# Altium PCB PCB Module Measurment.PcbDoc
Units mil, origin at the board's own origin, x right, y up, seen from the top; angles counter-clockwise.
Board outline 6000 x 4000 mil, 2 copper layers (Top Layer, Bottom Layer); 1 components, 0 nets, 40 pads, 0 vias.
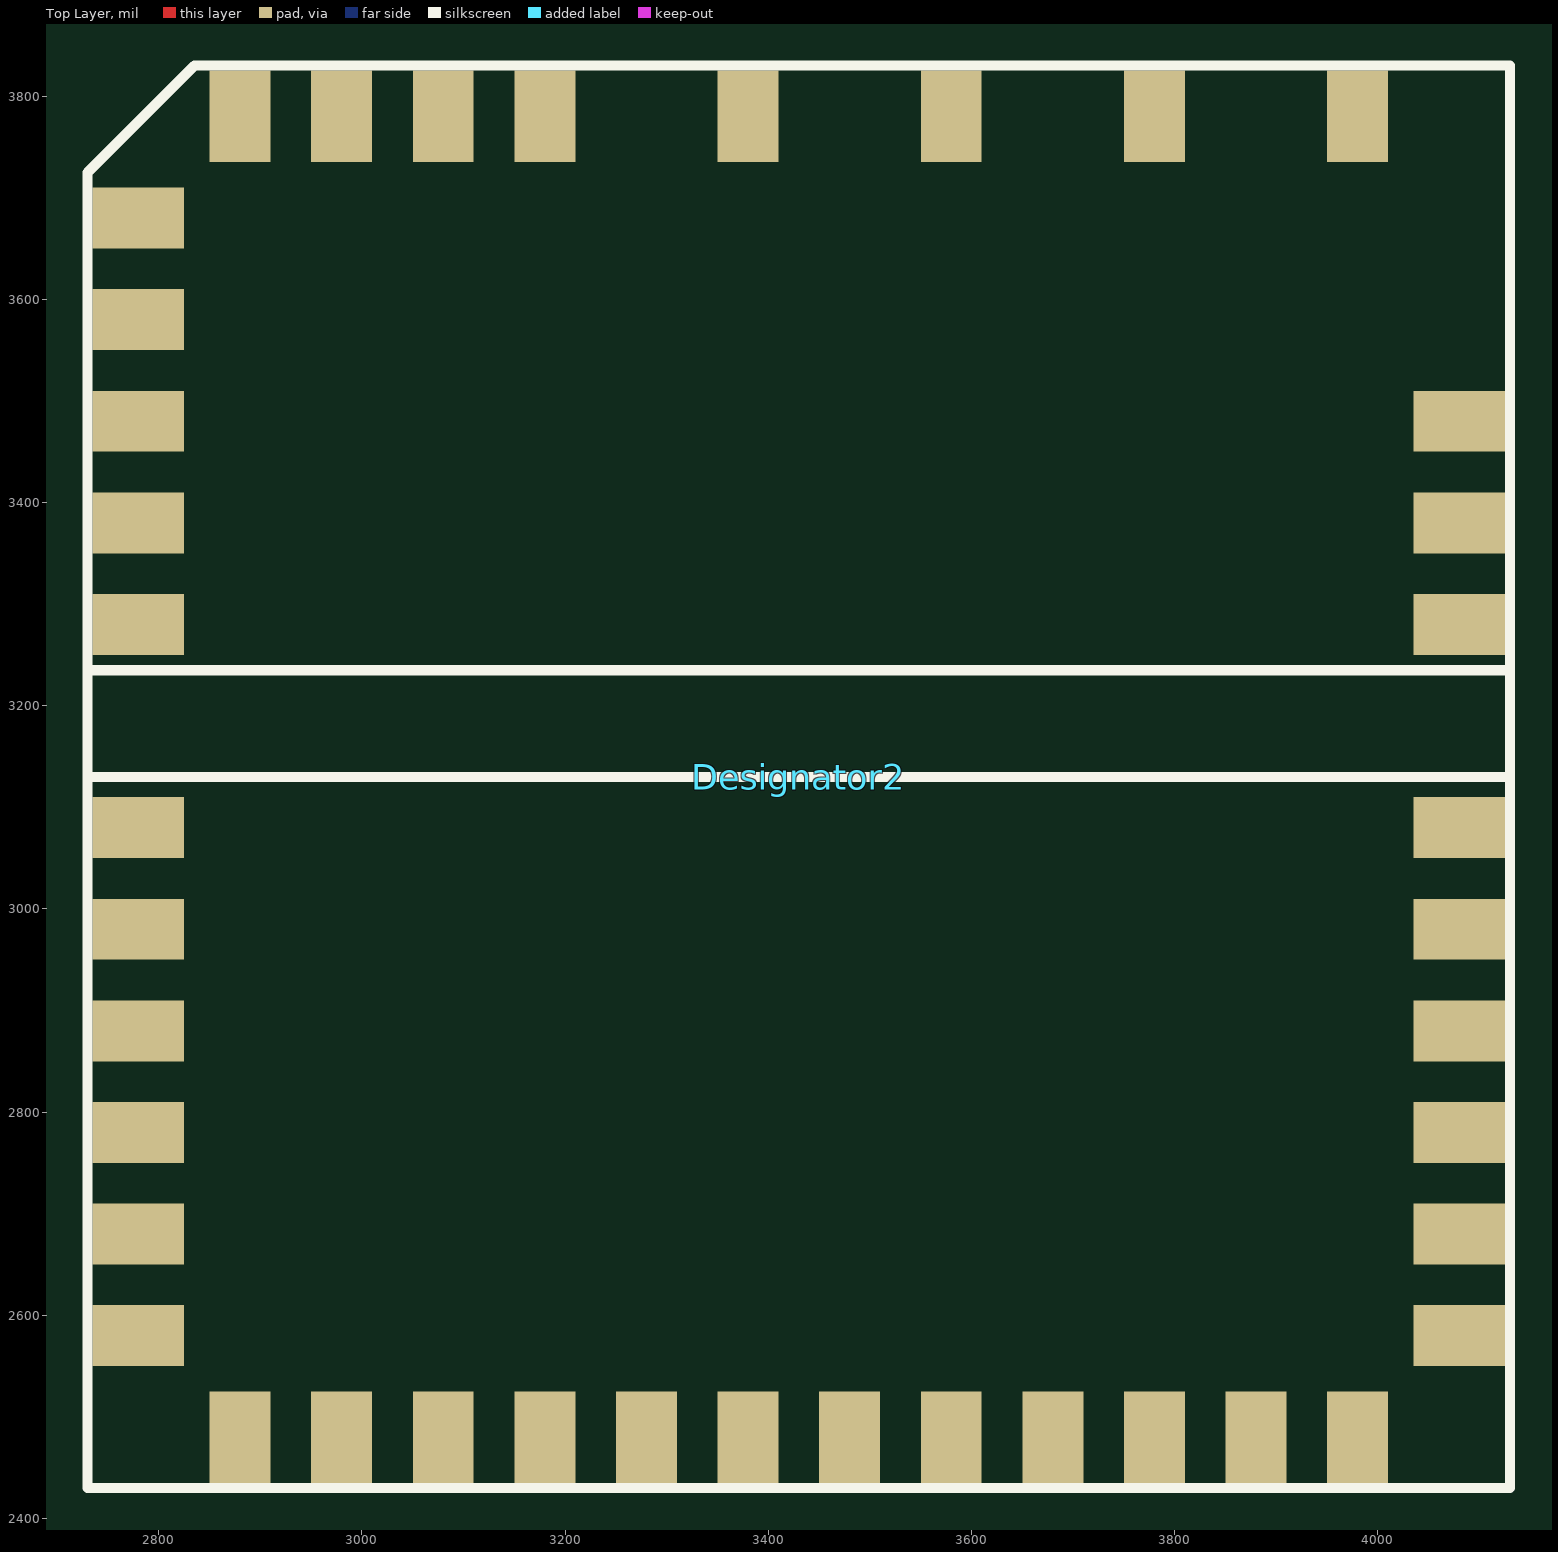
[diagram p0: Top Layer view]
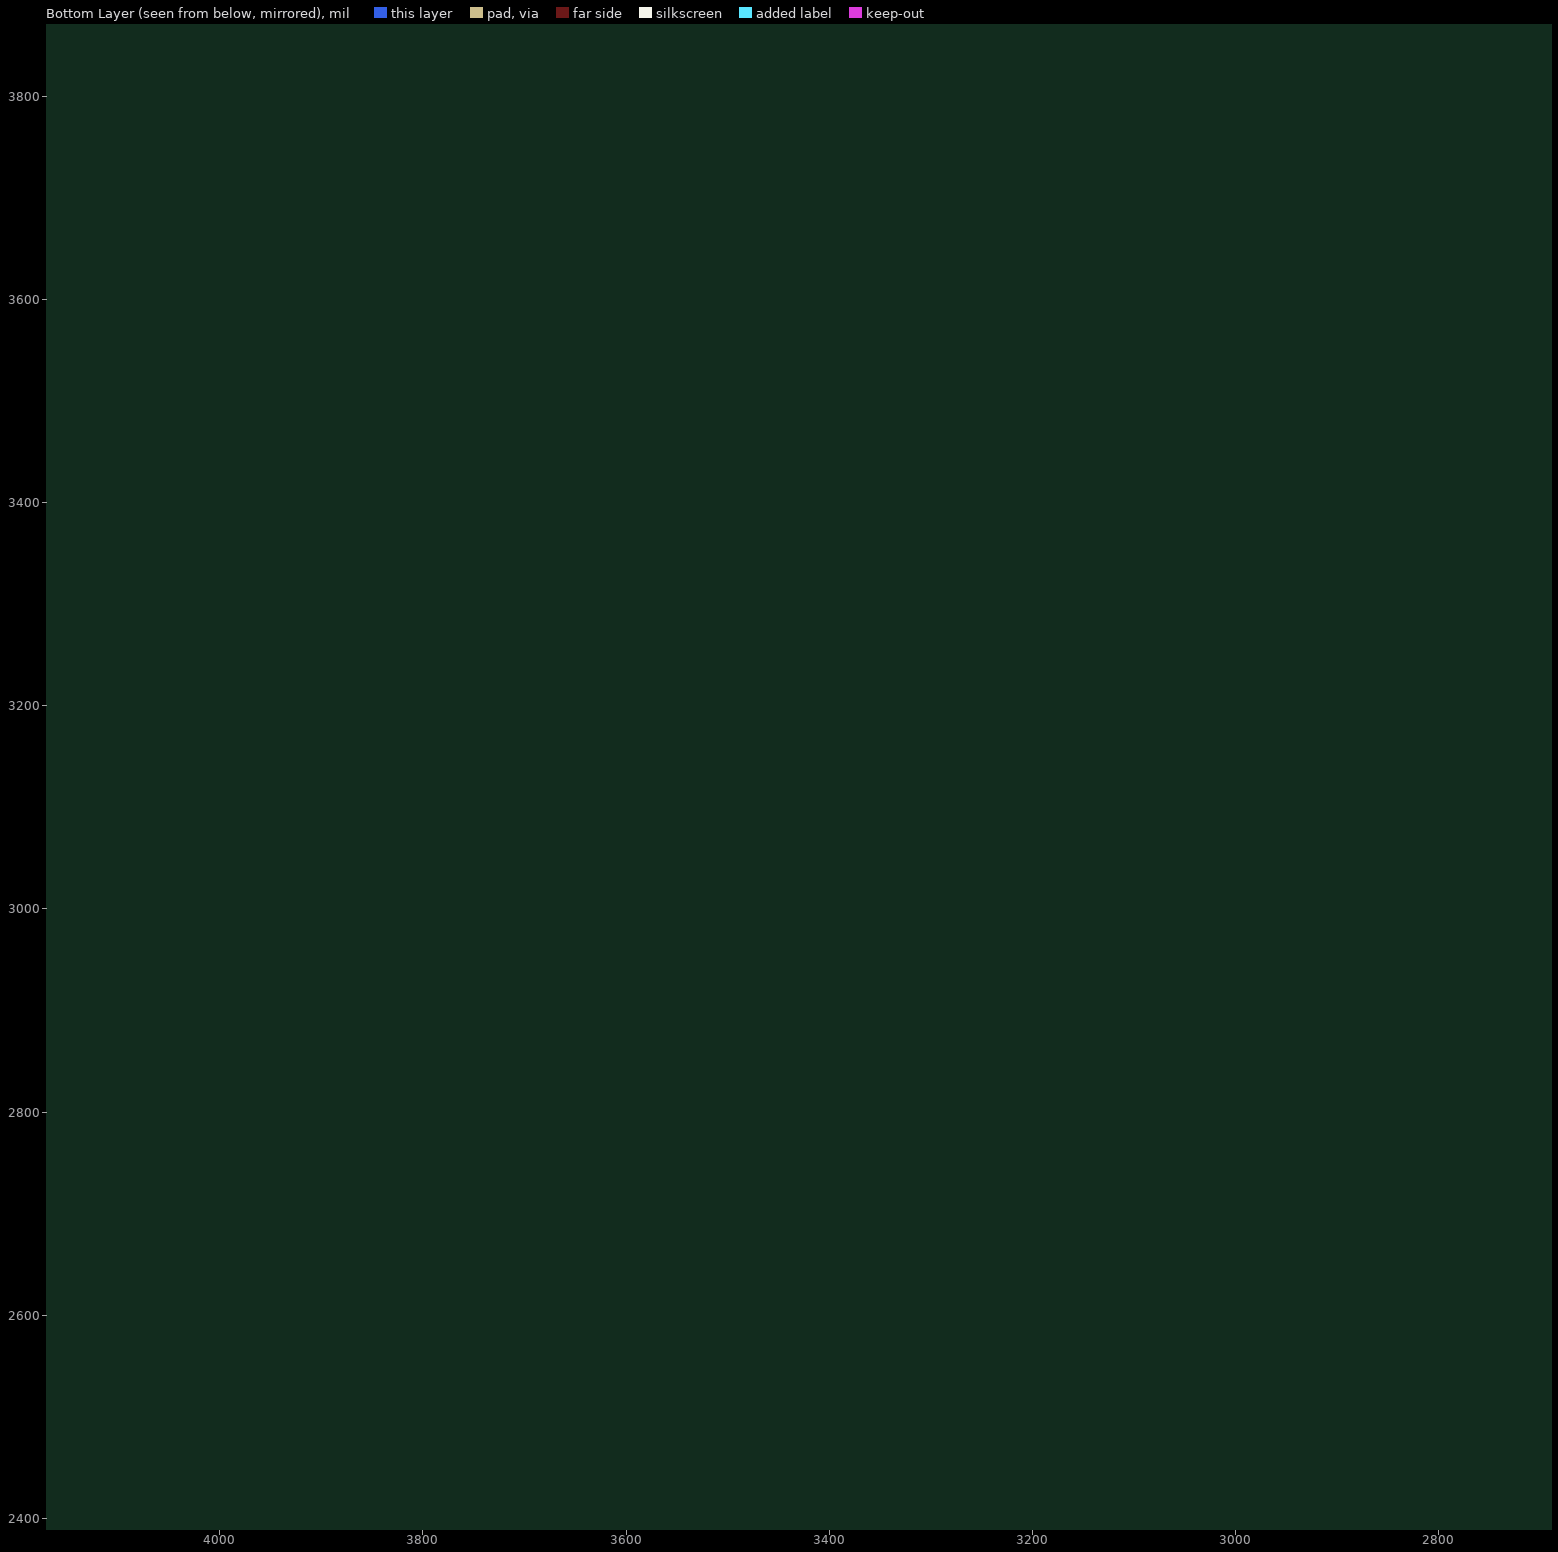
[diagram p1: Bottom Layer view, seen from below]

## Layer stack, top to bottom
Top Solder: solder mask 0.4, Solder Resist, Dk 3.5
Top Layer: signal copper 1.4
Dielectric 1: dielectric 12.6, FR-4, Dk 4.8
Bottom Layer: signal copper 1.4
Bottom Solder: solder mask 0.4, Solder Resist, Dk 3.5

## Board outline
1000,1000 7000,1000 7000,5000 1000,5000

## Design rules (kind name [scope] priority, off if disabled: settings)
Clearance [All] p1: gap=10
PolygonConnect [All] p1: connectstyle=Relief reliefconductorwidth=10 reliefentries=4 polygonreliefangle="90 Angle" airgapwidth=10
RoutingVias [All] p1: holewidth=28 width=50 viastyle="Through Hole" minholewidth=28 minwidth=50 maxholewidth=28 maxwidth=50
SolderMaskExpansion [All] p1: expansion=4
Width [All] p1: maxlimit=10 minlimit=10 preferedwidth=10
30 further rules are at their usual default settings.

## Components (designator, comment, footprint, x,y, rotation, side; value= is the part's Value field where it differs from the comment)
Designator2 "Comment" PSOM_SMD 3430,3130 r0 top

## Footprints (in the part's own frame and the unit in brackets; to place one, negate y for a bottom-side part, rotate by r counter-clockwise, add the part's x,y. Pads: shape width x height; smd on the part's side, far side on the other; paste and mask are expansions set on the pad)
PSOM_SMD [mil] "PSOM SMD module footprint V1"
  rect 90x60 smd paste-5: 1(-650,550) 2(-650,450) 3(-650,350) 4(-650,250) 5(-650,150) 6(-650,-50) 7(-650,-150) 8(-650,-250) 9(-650,-350) 10(-650,-450) 11(-650,-550) 24(650,-550) 25(650,-450) 26(650,-350) 27(650,-250) 28(650,-150) 29(650,-50) 30(650,150) 31(650,250) 32(650,350)
  rect 60x90 smd paste-5: 12(-550,-650) 13(-450,-650) 14(-350,-650) 15(-250,-650) 16(-150,-650) 17(-50,-650) 18(50,-650) 19(150,-650) 20(250,-650) 21(350,-650) 22(450,-650) 23(550,-650) 33(550,650) 34(350,650) 35(150,650) 36(-50,650) 37(-250,650) 38(-350,650) 39(-450,650) 40(-550,650)
  silkscreen extent -700,-700 700,700, body extent -652,-650 653,650, height 206

## Nets (pads, with @x,y where several pads share a name; then routed paths per layer and width w, separated by ;. In a path a pad name is that pad's centre, name@x,y a point inside that pad or via, vN(x,y) a via of type N, cw(c..) or ccw(c..) an arc to the next point about the centre after c; other vN are vias at no path point)
pads on no net: Designator2.1 Designator2.2 Designator2.3 Designator2.4 Designator2.5 Designator2.6 Designator2.7 Designator2.8 Designator2.9 Designator2.10 Designator2.11 Designator2.12 Designator2.13 Designator2.14 Designator2.15 Designator2.16 Designator2.17 Designator2.18 Designator2.19 Designator2.20 Designator2.21 Designator2.22 Designator2.23 Designator2.24 Designator2.25 Designator2.26 Designator2.27 Designator2.28 Designator2.29 Designator2.30 Designator2.31 Designator2.32 Designator2.33 Designator2.34 Designator2.35 Designator2.36 Designator2.37 Designator2.38 Designator2.39 Designator2.40

## Dimensions
3980,2435 to 3980,2525 on Mechanical 1
3950,2460 to 4010,2460 on Mechanical 1
2880,2480 to 2780,2580 on Mechanical 1
2880,2480 to 2980,2480 on Mechanical 1
2775,3180 to 4085,3175 on Top Overlay
3430.5,3780 to 3520,2480 on Top Overlay
4130,3830 to 4130,2430 on Top Overlay
2730,3725 to 4130,3830 on Top Overlay